# Altium PCB Bridge.PcbDoc
Units mil, origin at the board's own origin, x right, y up, seen from the top; angles counter-clockwise.
Board outline 1180 x 1090 mil, 2 copper layers (Top Layer, Bottom Side); 15 components, 10 nets, 93 pads, 0 vias.
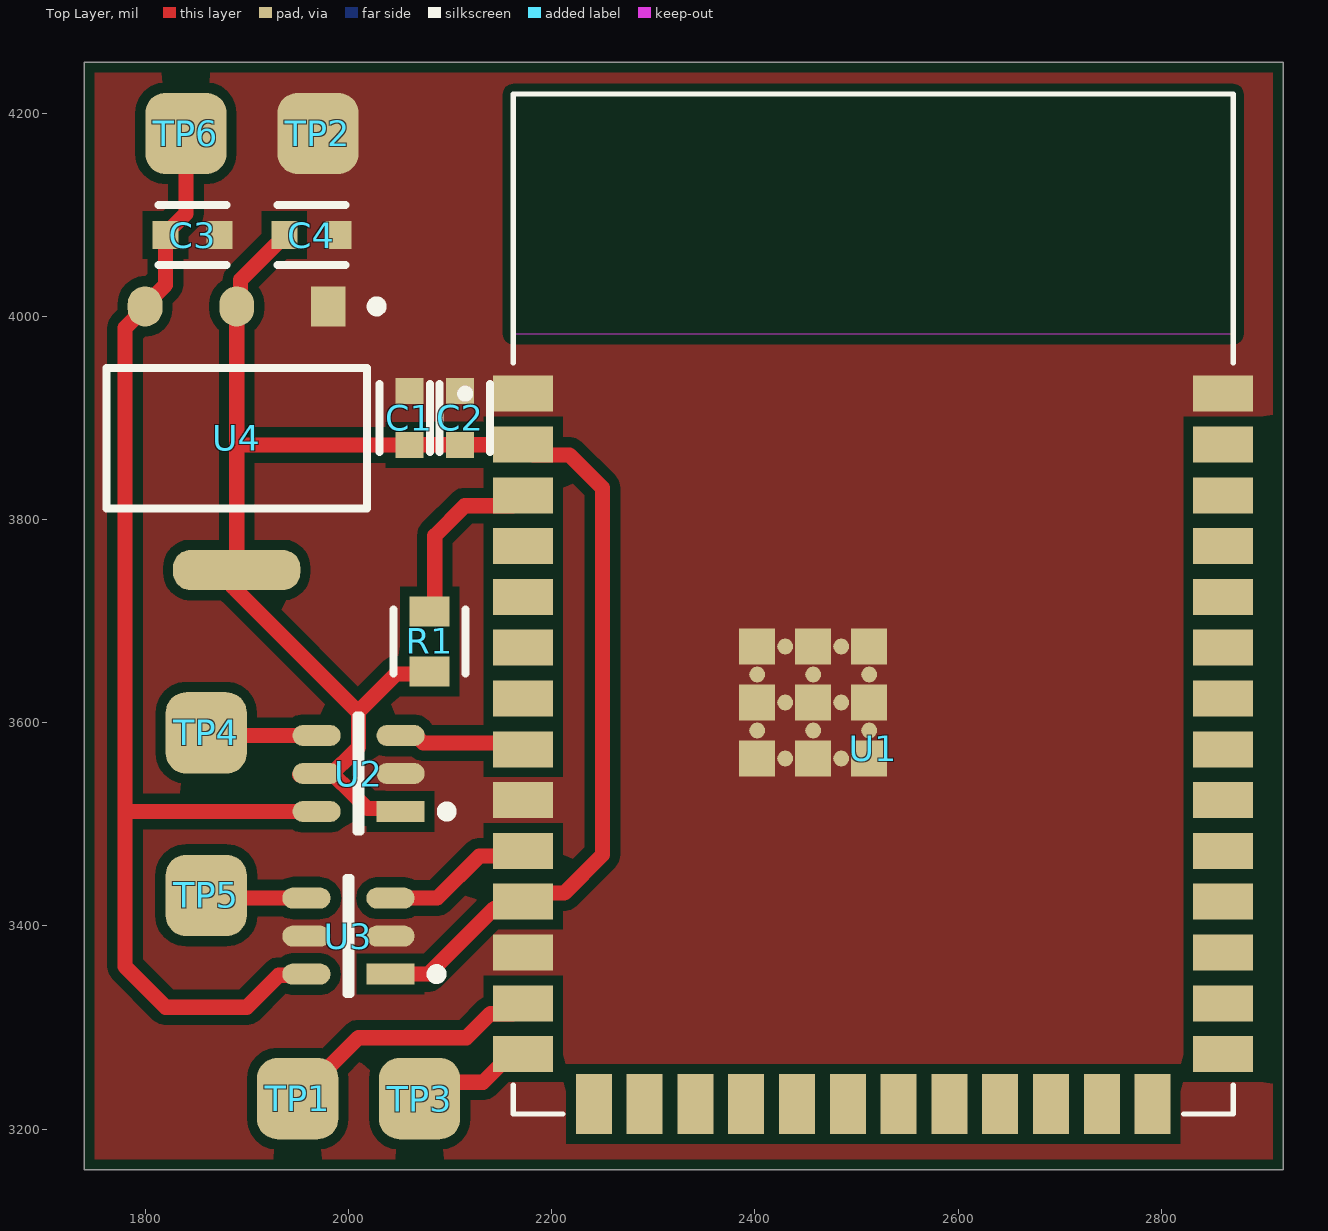
[diagram p0: Top Layer view]
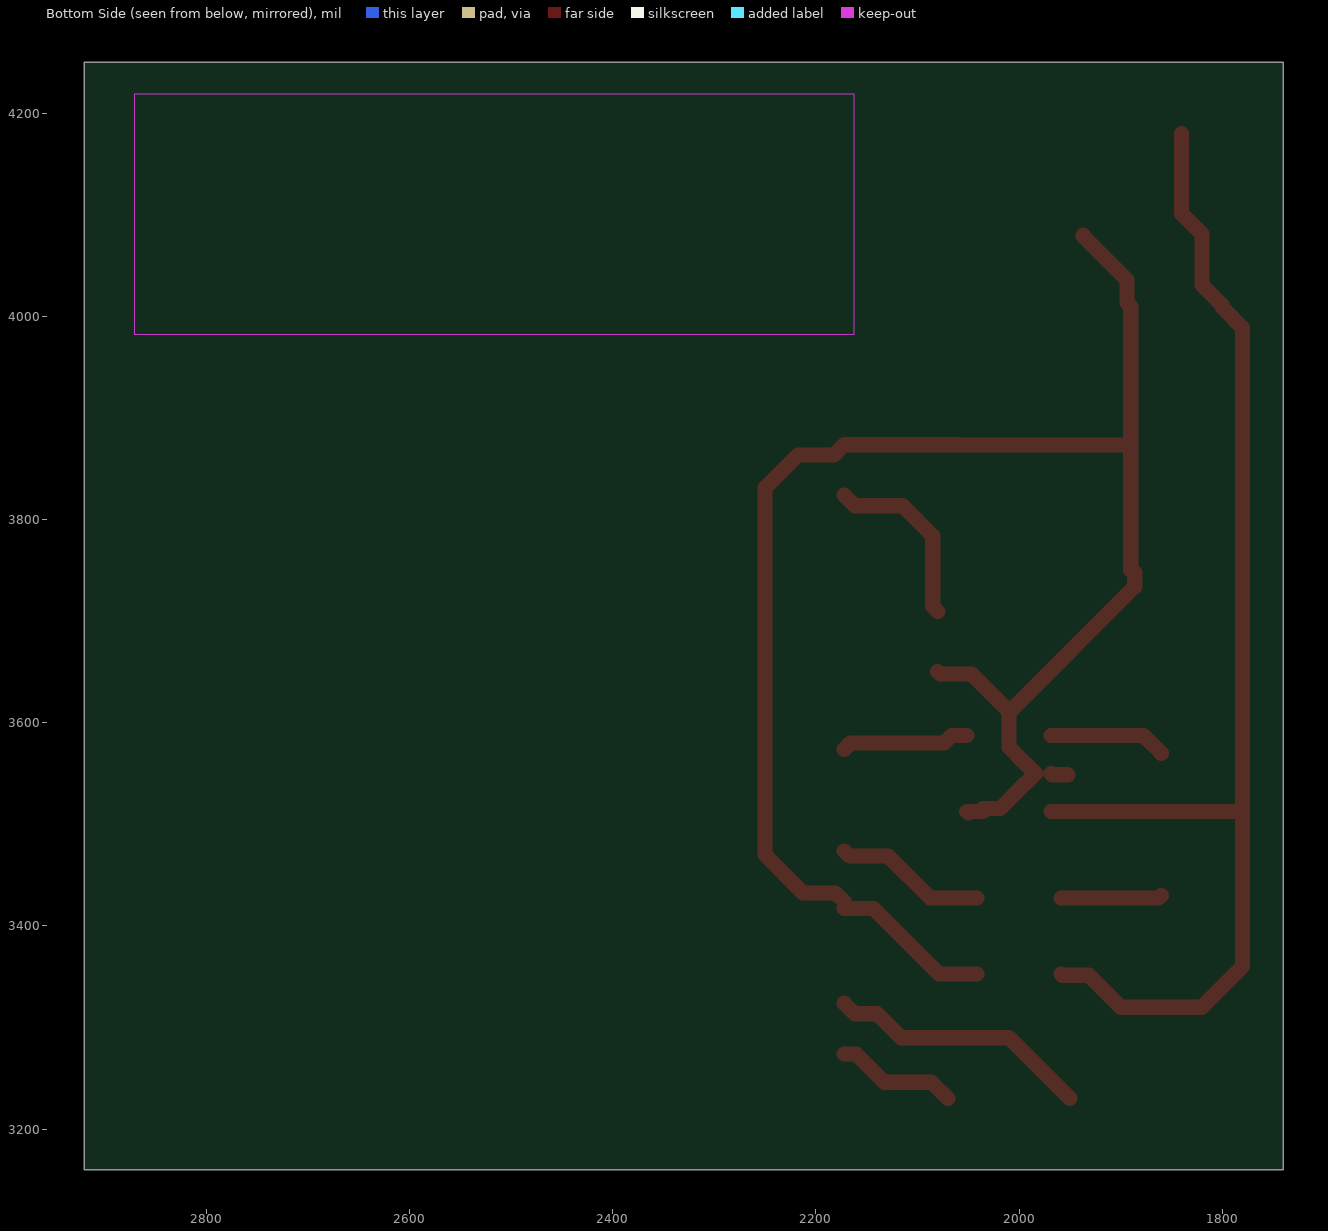
[diagram p1: Bottom Side view, seen from below]
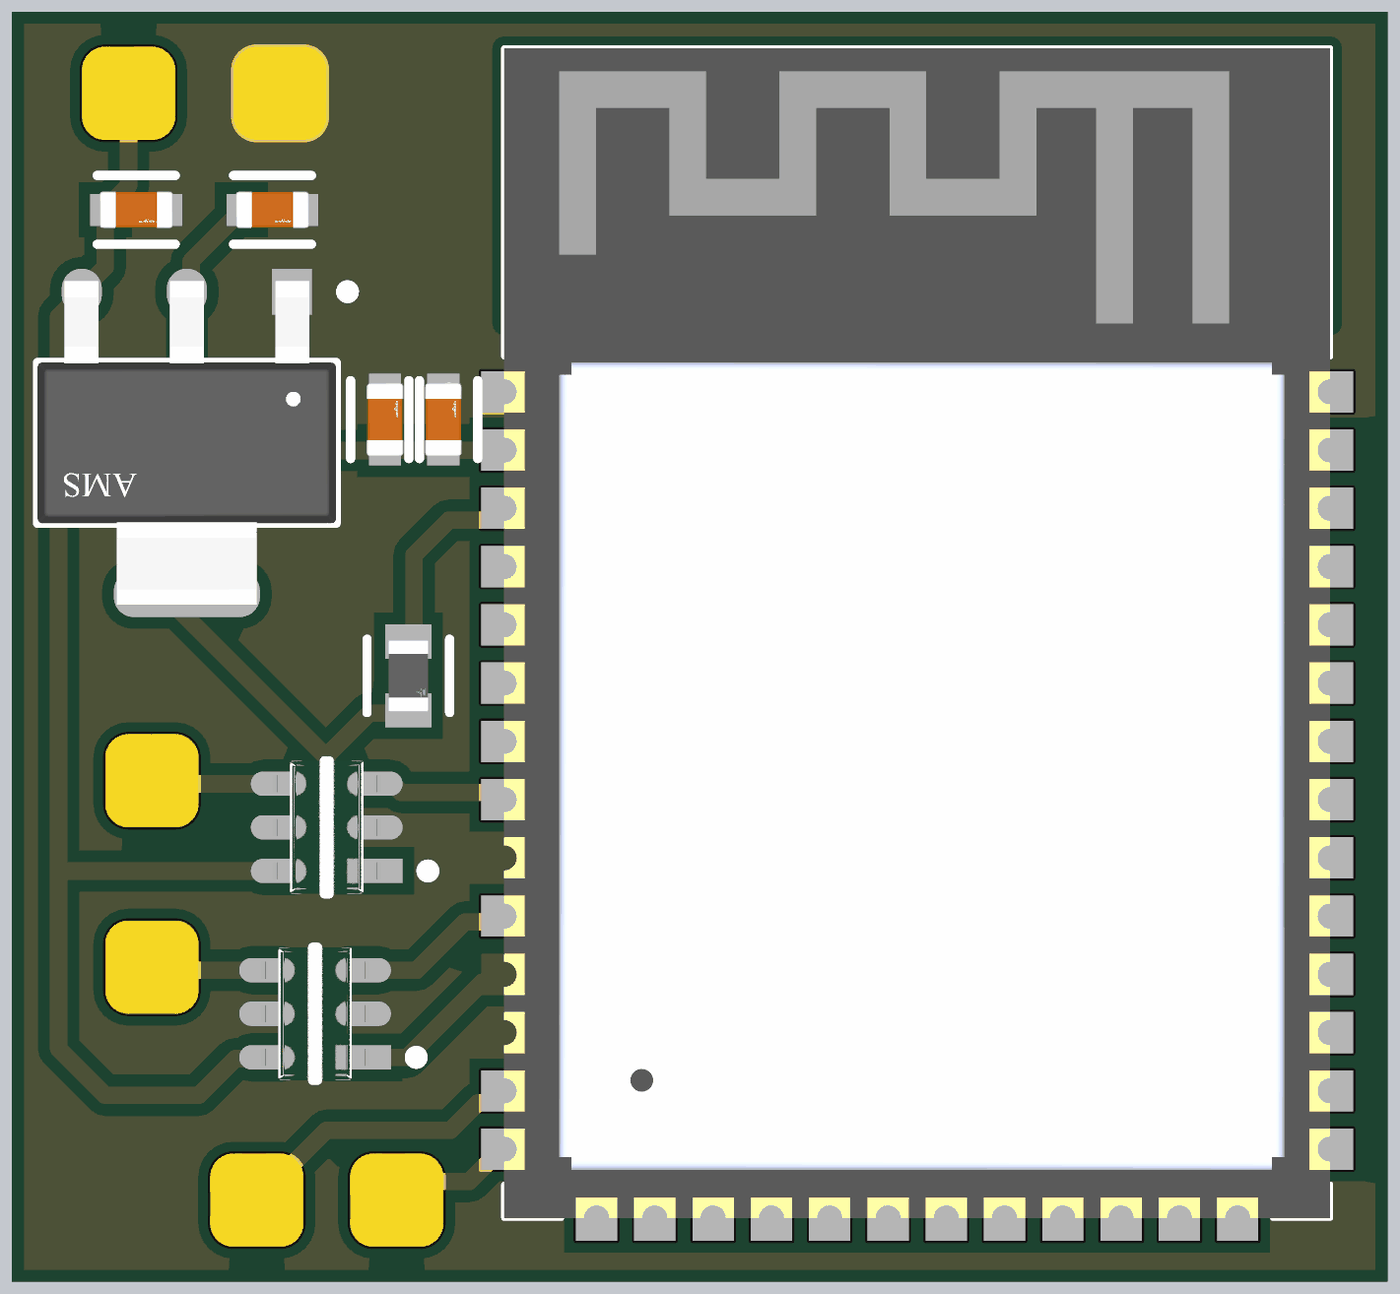
[diagram p2: 3D render of the assembled board from above, using the file's embedded part models]

## Layer stack, top to bottom
Top Solder: solder mask 0.4, Solder Resist, Dk 3.5
Top Layer: signal copper 1.4
Dielectric 1: dielectric 12.6, FR-4, Dk 4.8
Bottom Side: signal copper (thickness not stored)

## Board outline
1740,3160 1740,4250 2920,4250 2920,3160

## Design rules (kind name [scope] priority, off if disabled: settings)
BoardOutlineClearance [All] p1: gap=10 ignorepadtopadclearanceinfootprint=FALSE except(0: Arc-SplitContinuation Track-SplitContinuation SMDPad-SplitContinuation THPad-SplitContinuation Via-SplitContinuation Fill-SplitContinuation Poly-SplitContinuation Region-SplitContinuation Text-SplitContinuation)
Clearance Clearance_Tie [InComponent('NT1', 'NT2')] p1: gap=0 ignorepadtopadclearanceinfootprint=TRUE
Clearance Clearance_PWR [InNet('PWRGND')] p2: gap=10 ignorepadtopadclearanceinfootprint=TRUE except(0: Arc-Text Track-Text SMDPad-Text THPad-Text Via-Text Fill-Text Poly-Text Region-Text Text-Text; 15: Fill-Fill Fill-Poly Fill-Region Poly-Poly Poly-Region Region-Region)
Clearance [All] p3: gap=10 ignorepadtopadclearanceinfootprint=TRUE except(0: Arc-Text Track-Text SMDPad-Text THPad-Text Via-Text Fill-Text Poly-Text Region-Text Text-Text)
ComponentClearance ComponentClearance_NT [InComponent('NT1','NT2')] p1: gap=0 collisioncheckmode=3 verticalgap=0 showdistances=FALSE donotcheckwithout3dbody=TRUE
ComponentClearance [All] p2: gap=10 collisioncheckmode=3 verticalgap=10 showdistances=FALSE
DiffPairsRouting [All] p1: maxlimit=10 minlimit=10 mostfreqgap=10 toplayer_minwidth=15 toplayer_maxwidth=15 toplayer_prefwidth=15 bottomlayer_minwidth=15 bottomlayer_maxwidth=15 bottomlayer_prefwidth=15 substack1={32540F70-BAA5-4A26-864A-597677C52C12} toplayer_{32540f70-baa5-4a26-864a-597677c52c12}_minwidth=15 toplayer_{32540f70-baa5-4a26-864a-597677c52c12}_maxwidth=15 toplayer_{32540f70-baa5-4a26-864a-597677c52c12}_prefwidth=15 bottomlayer_{32540f70-baa5-4a26-864a-597677c52c12}_minwidth=15 bottomlayer_{32540f70-baa5-4a26-864a-597677c52c12}_maxwidth=15 bottomlayer_{32540f70-baa5-4a26-864a-597677c52c12}_prefwidth=15 maxuncoupledlength=500
HoleSize [All] p1: absolutevalues=TRUE maxlimit=200 minlimit=1 maxpercent=80.000 minpercent=20.000
MinimumSolderMaskSliver [All] p1: minsoldermaskwidth=2
PolygonConnect PolygonConnect_Ant [HasFootprint('433MHz_Ant')] p1: thpad.connectstyle=Relief thpad.reliefconductorwidth=25 thpad.reliefentries=4 thpad.polygonreliefangle="90 Angle" thpad.airgapwidth=10 smdpad.connectstyle=Direct smdpad.reliefconductorwidth=25 smdpad.reliefentries=4 smdpad.polygonreliefangle="90 Angle" smdpad.airgapwidth=10 via.connectstyle=Direct via.reliefconductorwidth=25 via.reliefentries=4 via.polygonreliefangle="90 Angle" via.airgapwidth=0
PolygonConnect [All] p2: thpad.connectstyle=Relief thpad.reliefconductorwidth=25 thpad.reliefentries=4 thpad.polygonreliefangle="90 Angle" thpad.airgapwidth=10 smdpad.connectstyle=Direct smdpad.reliefconductorwidth=10 smdpad.reliefentries=4 smdpad.polygonreliefangle="90 Angle" smdpad.airgapwidth=10 via.connectstyle=Direct via.reliefconductorwidth=25 via.reliefentries=4 via.polygonreliefangle="90 Angle" via.airgapwidth=0
RoutingVias [All] p1: holewidth=32 width=60 viastyle="Through Hole" minholewidth=24 minwidth=40 maxholewidth=40 maxwidth=100
ShortCircuit ShortCircuit_Tie [InComponent('NT1', 'NT2')] p1: allowed=TRUE
ShortCircuit [All] p2: allowed=FALSE
SilkToSilkClearance [All] p1: silktosilkclearance=0
SilkToSolderMaskClearance [IsPad] p1: minsilkscreentomaskgap=1 clearancetoexposedcopper=TRUE
SolderMaskExpansion SolderMaskExpansion_via [IsVia] p1: expansion=4 istentingtop=TRUE
SolderMaskExpansion [All] p2: expansion=2 istentingtop=FALSE
SupplyNets "Schematic Supply Nets_2" [InNet('+5V')] p1: voltage=0.000
SupplyNets "Schematic Supply Nets_1" [InNet('+3.3V')] p2: voltage=0.000
SupplyNets "Schematic Supply Nets" [InNet('GND')] p3: voltage=0.000
Width [All] p1: maxlimit=100 minlimit=10 preferedwidth=15 substack1={32540F70-BAA5-4A26-864A-597677C52C12}
23 further rules are at their usual default settings.

## Components (designator, comment, footprint, x,y, rotation, side; value= is the part's Value field where it differs from the comment)
C1 "100nF" FP-GRM0603-MFG 2060,3900 r90 top
C2 "2.2uF" FP-GRM0603-MFG 2110,3900 r90 top
C3 "2.2uF" FP-GRM0603-MFG 1846.57,4080 r0 top
C4 "2.2uF" FP-GRM0603-MFG 1963.43,4080 r0 top
R1 "10.0kΩ" FP-CRCW0603-E3-MFG 2080,3680 r270 top
TP1 "DN" FP-Testpoint 1950,3230 r0 top
TP2 "GND" FP-Testpoint 1970,4180 r180 top
TP3 "DP" FP-Testpoint 2070,3230 r0 top
TP4 "RX" FP-Testpoint 1860,3590 r90 top
TP5 "TX" FP-Testpoint 1860,3430 r90 top
TP6 "5V" FP-Testpoint 1840,4180 r180 top
U1 "ESP32-S3-WROOM-1-N8R8" XCVR_ESP32S3WROOM1N8R8 2516.5,3716.73 r0 top
U2 "SN74LVC1T45DBVR" FP-DBV0006A-IPC_C 2010,3550 r180 top
U3 "SN74LVC1T45DBVR" FP-DBV0006A-IPC_C 2000,3390 r180 top
U4 "AMS1117-3.3" FP-AMS1117-IPC_C 1890,3880 r270 top

## Footprints (in the part's own frame and the unit in brackets; to place one, negate y for a bottom-side part, rotate by r counter-clockwise, add the part's x,y. Pads: shape width x height; smd on the part's side, far side on the other; paste and mask are expansions set on the pad)
FP-AMS1117-IPC_C [mm]
  rect 1.004x0.872 smd paste+0 mask+0: 1(-3.295,2.29)
  rrect100% 1.004x0.872 smd paste+0 mask+0: 2(-3.295,0) 3(-3.295,-2.29)
  rrect87% 1.004x3.182 smd paste+0 mask+0: 4(3.295,0)
  silkscreen extent -3.42,-3.25 1.75,3.63, body extent -3.9,-3.35 3.9,3.35, height 0.25
FP-CRCW0603-E3-MFG [mm]
  rect 0.75x1 smd paste+0 mask+0: 1(-0.75,0) 2(0.75,0)
  silkscreen extent -0.8,-0.9 0.8,0.9, body extent -1.22,-0.6 1.22,0.6, height 0.25
FP-DBV0006A-IPC_C [mm]
  rect 1.205x0.53 smd paste+0 mask+0: 1(-1.05,0.95)
  rrect100% 1.205x0.53 smd paste+0 mask+0: 2(-1.05,0) 3(-1.05,-0.95) 4(1.05,-0.95) 5(1.05,0) 6(1.05,0.95)
  silkscreen extent -2.33,-1.45 0.05,1.45, body extent -1.75,-1.55 1.75,1.55, height 0.25
FP-GRM0603-MFG [mm]
  rect 0.65x0.7 smd paste+0 mask+0: 1(-0.675,0) 2(0.675,0)
  silkscreen extent -0.85,-0.75 0.85,0.75, body extent -1.1,-0.55 1.1,0.55, height 0.25
FP-Testpoint [mil]
  rrect50% 80x80 smd paste-99999: 1(0,0)
XCVR_ESP32S3WROOM1N8R8 [mm]
  rect 1.5x0.9 smd: 1(-8.75,5.26) 2(-8.75,3.99) 3(-8.75,2.72) 4(-8.75,1.45) 5(-8.75,0.18) 6(-8.75,-1.09) 7(-8.75,-2.36) 8(-8.75,-3.63) 10(-8.75,-6.17) 13(-8.75,-9.98) 14(-8.75,-11.25) 27(8.75,-11.25) 28(8.75,-9.98) 29(8.75,-8.71) 30(8.75,-7.44) 31(8.75,-6.17) 32(8.75,-4.9) 33(8.75,-3.63) 34(8.75,-2.36) 35(8.75,-1.09) 36(8.75,0.18) 37(8.75,1.45) 38(8.75,2.72) 39(8.75,3.99) 40(8.75,5.26)
  rect 1.5x0.9 smd paste-2539.97 mask+0.051: 9(-8.75,-4.9) 11(-8.75,-7.44) 12(-8.75,-8.71)
  rect 0.9x1.5 smd: 15(-6.985,-12.5) 16(-5.715,-12.5) 17(-4.445,-12.5) 18(-3.175,-12.5) 19(-1.905,-12.5) 20(-0.635,-12.5) 21(0.635,-12.5) 22(1.905,-12.5) 23(3.175,-12.5) 24(4.445,-12.5) 25(5.715,-12.5) 26(6.985,-12.5)
  rect 0.9x0.9 smd: 41_1(-1.5,-2.46) 41_2(-2.9,-2.46) 41_3(-0.1,-2.46) 41_4(-2.9,-3.86) 41_5(-1.5,-3.86) 41_6(-0.1,-3.86) 41_7(-2.9,-1.06) 41_8(-1.5,-1.06) 41_9(-0.1,-1.06)
  round 0.4 smd mask+0: 41_10(-1.5,-1.76) 41_11(-2.9,-1.76) 41_12(-0.1,-1.76) 41_13(-2.9,-3.16) 41_14(-1.5,-3.16) 41_15(-0.1,-3.16) 41_16(-2.2,-1.06) 41_17(-0.8,-1.06) 41_18(-2.2,-2.46) 41_19(-0.8,-2.46) 41_20(-2.2,-3.86) 41_21(-0.8,-3.86)
  Keep-Out Layer region: 9,6.75 -9,6.75 -9,12.75 9,12.75
  Keep-Out Layer region: 9,6.75 -9,6.75 -9,12.75 9,12.75
  silkscreen extent -10.3,-12.75 9,12.75, body extent -9,-12.75 9,12.75, height 3.25

## Part data
C1: library part GRM188R71E104KA01D, "Cap 100nF 25V X7R 0603 ±10%", Capacitance(pF)=100000, Dielectric Type=X7R, Manufacturer=Murata, Maximum Voltage=25V, Temperature Coefficient=±15%, Temperature Range="-55 to 125°C", Tolerance=±10%, Capacitance=100nF, Dimensions=1.6x0.8mm, Packaging=D, Part Number=GRM188R71E104KA01D, Series=GRM, Size Code=0603, Spec Code=A01, Thickness=0.8mm
C2 C3 C4: library part GRM188R71A225KE15D, "Cap 2.2uF 10V X7R 0603 ±10%", Capacitance(pF)=2200000, Dielectric Type=X7R, Manufacturer=Murata, Maximum Voltage=10V, Temperature Coefficient=±15%, Temperature Range="-55 to 125°C", Tolerance=±10%, Capacitance=2.2uF, Dimensions=1.6x0.8mm, Packaging=D, Part Number=GRM188R71A225KE15D, Series=GRM, Size Code=0603, Spec Code=E15, Thickness=0.8mm
R1: library part CRCW060310K0JN, "Resistor 10.0kΩ ±5% 0603 ±200 ppm/K", Jumper Current=-, Manufacturer=Vishay, Max Voltage=75V, Power @ 70°C=0.1W, Resistance Code=10K0, Resistance(Ohms)=10000, Tolerance=±5%, Tolerance Code=J, Jumper=No, Metric Size=RR1608M, Packaging Codes="EA, EB, EC, ED, EE, EI, EL", Packaging Info="ET1 (5000pcs); ET5 (10000pcs); ET6 (20000pcs); ET7 (10000pcs); EF4 (50000pcs); ET2 (5000pcs); ET4 (20000pcs)", Part Number=CRCW060310K0JN, Quantities="5000, 10000, 20000, 10000, 50000, 5000, 20000", Reel Sizes="285mm, 330mm, 180mm", Resistance=10.0kΩ, Series="D/CRCW e3", Size=0603, Tape Pitches="2mm, 4mm", TCR="±200 ppm/K", TCR Code=N
TP1 TP2 TP3 TP4 TP5 TP6: library part Testpoint
U1: "Bluetooth, WiFi 802.11b/g/n, Bluetooth v5.0 Transceiver Module 2.4GHz PCB Trace Surface Mount", Package=None, Availability="In Stock", Check_prices=https://www.snapeda.com/parts/ESP32-S3-WROOM-1-N8R8/Espressif+Systems/view-part/?ref=eda, MF="Espressif Systems", MP=ESP32-S3-WROOM-1-N8R8, Price=None, Purchase-URL=https://pricing.snapeda.com/search?q=ESP32-S3-WROOM-1-N8R8&ref=eda, SnapEDA_Link=https://www.snapeda.com/parts/ESP32-S3-WROOM-1-N8R8/Espressif+Systems/view-part/?ref=snap
U2 U3: library part CMP-0859-00206-4, "IC TRNSLTR BIDIRECTIONAL SOT23-6", Case/Package=SOT-23, High Level Output Current=-32mA, Low Level Output Current=32mA, Max Operating Temperature=85°C, Max Supply Voltage=5.5V, Min Operating Temperature=-40°C, Min Supply Voltage=1.65V, Package Quantity=3000, Quiescent Current=3uA, Contact Plating=Gold, Data Rate=420Mbps, Direction=Bidirectional, Height=1.75mm, Lead Free="Lead Free", Length=3.05mm, Logic Function=Translator, Mount="Surface Mount", Number of Bits=1, Number Of Channels=1, Number of Elements=1, Number of Inputs=1, Number of Pins=6, Packaging="Tape and Reel", Polarity=Non-Inverting, Propagation Delay=3.9ns, Radiation Hardening=No, REACH SVHC="No SVHC", Turn-On Delay Time=36.2ns, Weight=0.000229oz, Width=1.3mm
U4: library part CMP-209535-000001-1, "LDO Voltage Regulators 1A, 3.3V", Dropout Voltage=1.1V, Manufacturer="Advanced Monolithic Systems", Max Junction Temp=+125°C, Max Power Dissipation=1.2W, Max Supply Voltage=15V, Nominal Supply Current=5mA, Output Current=1A, Output Voltage=3.3V, Package=AMS1117, Temperature="-40°C to +125°C", Temperature Range Low=-40°C, Automotive=No, Category=IC, ComponentLink2Description=Datasheet, ComponentLink2URL=http://www.advanced-monolithic.com/pdf/ds1117.pdf, Device Class L1="Integrated Circuits (ICs)", Device Class L2="Power Management ICs", Device Class L3="Voltage Regulators - Linear", Height=1.8mm, Ipc Land Pattern Name=SOT229P700X180-4, Lead Free=Yes, Manufacturer Part Number=AMS1117-3.3, Number Of Outputs=1, Octopart=https://octopart.com/ams1117-3.3-advanced+monolithic+systems-25899300, Output Type=Fixed, RoHS=TRUE, Standoff Height=0.64mm, Temperature Range High=+125°C

## Nets (pads, with @x,y where several pads share a name; then routed paths per layer and width w, separated by ;. In a path a pad name is that pad's centre, name@x,y a point inside that pad or via, vN(x,y) a via of type N, cw(c..) or ccw(c..) an arc to the next point about the centre after c; other vN are vias at no path point)
+3.3V: C1.1 C2.1 C4.1 R1.2 U1.2 U1.11 U2.1 U2.5 U3.1 U4.2 U4.4 | length 1793.6
  Top Layer w15: 1890,3873.43 U4.2 1893.7,4013.42 1893.7,4035.86 1936.85,4079.02 C4.1 ; U2.5@1952.13,3548.88 1967.52,3548.88 U2.5 ; U2.1@2035.24,3512.6 2035.24,3515.42 2035.13,3515.53 2018.51,3515.53 1993.51,3540.53 1993,3540.53 1983.52,3550 1993,3559.47 1993.51,3559.47 2009.87,3575.83 2009.87,3610.13 ; U2.1@2038.06,3512.6 U2.1 U2.1@2049.81,3511.05 ; U3.1 2078.8,3352.6 2143.23,3417.03 U1.11@2172.01,3417.03 ; R1.2 2077.48,3647.95 2046.6,3647.95 2009.87,3611.21 2009.87,3610.13 ; U1.11 2180.64,3432.45 2212.45,3432.45 2250,3470 2250,3831.21 2217.61,3863.6 2182.22,3863.6 U1.2 2171.81,3873.62 2060.2,3873.62 C1.1 1894.53,3873.43 1890,3868.9 U4.4 1886.08,3747.71 1886.08,3733.92 1890,3730 2004.93,3615.07 2009.87,3610.13
+5V: C3.1 TP6.1 U2.6 U3.6 U4.3 | length 1240.3
  Top Layer w15: U4.3 1799.84,4008.51 1780,3988.67 1780,3512.6 ; U4.3@1799.84,4010.62 1820,4030.78 C3.1 ; C3.1@1820,4080.98 1840,4100.98 TP6.1 ; U3.6 1957.52,3351.48 1931.48,3351.48 1900,3320 1820,3320 1780,3360 1780,3512.6 ; U2.6 1780,3512.6
DN: TP1.1 U1.13 | length 260.9
  Top Layer w15: TP1.1 2010,3290 2116.2,3290 2139.8,3313.6 2161.79,3313.6 U1.13
DP: TP3.1 U1.14 | length 120.2
  Top Layer w15: TP3.1 2086.12,3246.12 2132.5,3246.12 2160.2,3273.82 U1.14
ESP_RX: U1.10 U3.3 | length 149.9
  Top Layer w15: U3.3 2087.4,3427.4 2128.77,3468.77 2166.96,3468.77 U1.10
ESP_TX: U1.8 U2.3 | length 126.3
  Top Layer w15: U2.3 2066.24,3587.4 2073.64,3580 2165.83,3580 U1.8
GND: C1.2 C2.2 C3.2 C4.2 TP2.1 U1.1 U1.9 U1.12 U1.40 U1.41_1 U1.41_2 U1.41_3 U1.41_4 U1.41_5 U1.41_6 U1.41_7 U1.41_8 U1.41_9 U1.41_10 U1.41_11 U1.41_12 U1.41_13 U1.41_14 U1.41_15 U1.41_16 U1.41_17 U1.41_18 U1.41_19 U1.41_20 U1.41_21 U2.2 U3.2 U3.5 U4.1
NetR1_1: R1.1 U1.3 | length 180.1
  Top Layer w15: R1.1 2084.92,3714.45 2084.92,3783.96 2114.56,3813.6 2161.79,3813.6 U1.3
POS_RX: TP4.1 U2.4 | length 115.9
  Top Layer w15: TP4.1@1860,3570 1877.4,3587.4 U2.4
POS_TX: TP5.1 U3.4 | length 99.7
  Top Layer w15: TP5.1 1862.6,3427.4 U3.4
pads on no net: U1.4 U1.5 U1.6 U1.7 U1.15 U1.16 U1.17 U1.18 U1.19 U1.20 U1.21 U1.22 U1.23 U1.24 U1.25 U1.26 U1.27 U1.28 U1.29 U1.30 U1.31 U1.32 U1.33 U1.34 U1.35 U1.36 U1.37 U1.38 U1.39

## Polygon pours and split planes (outlines as drawn)
GND on Top Layer "NONET_L-01_P-001" (solid, pour order 1): 1740,4250 2920,4250 2920,3160 1740,3160

## Text inside footprints (layer, text, board x,y; h text height)
U1: Top 3D Body "ANTENNA" at 2339.33,4090.75 h50